# Altium PCB PCB1.PcbDoc (part 1 of 2)
Units mm, origin at the board's own origin, x right, y up, seen from the top; angles counter-clockwise.
Board outline 60 x 47.5 mm, 2 copper layers (Top Layer, Bottom Layer), stack 1.591 mm thick; 64 components, 51 nets, 234 pads, 103 vias.
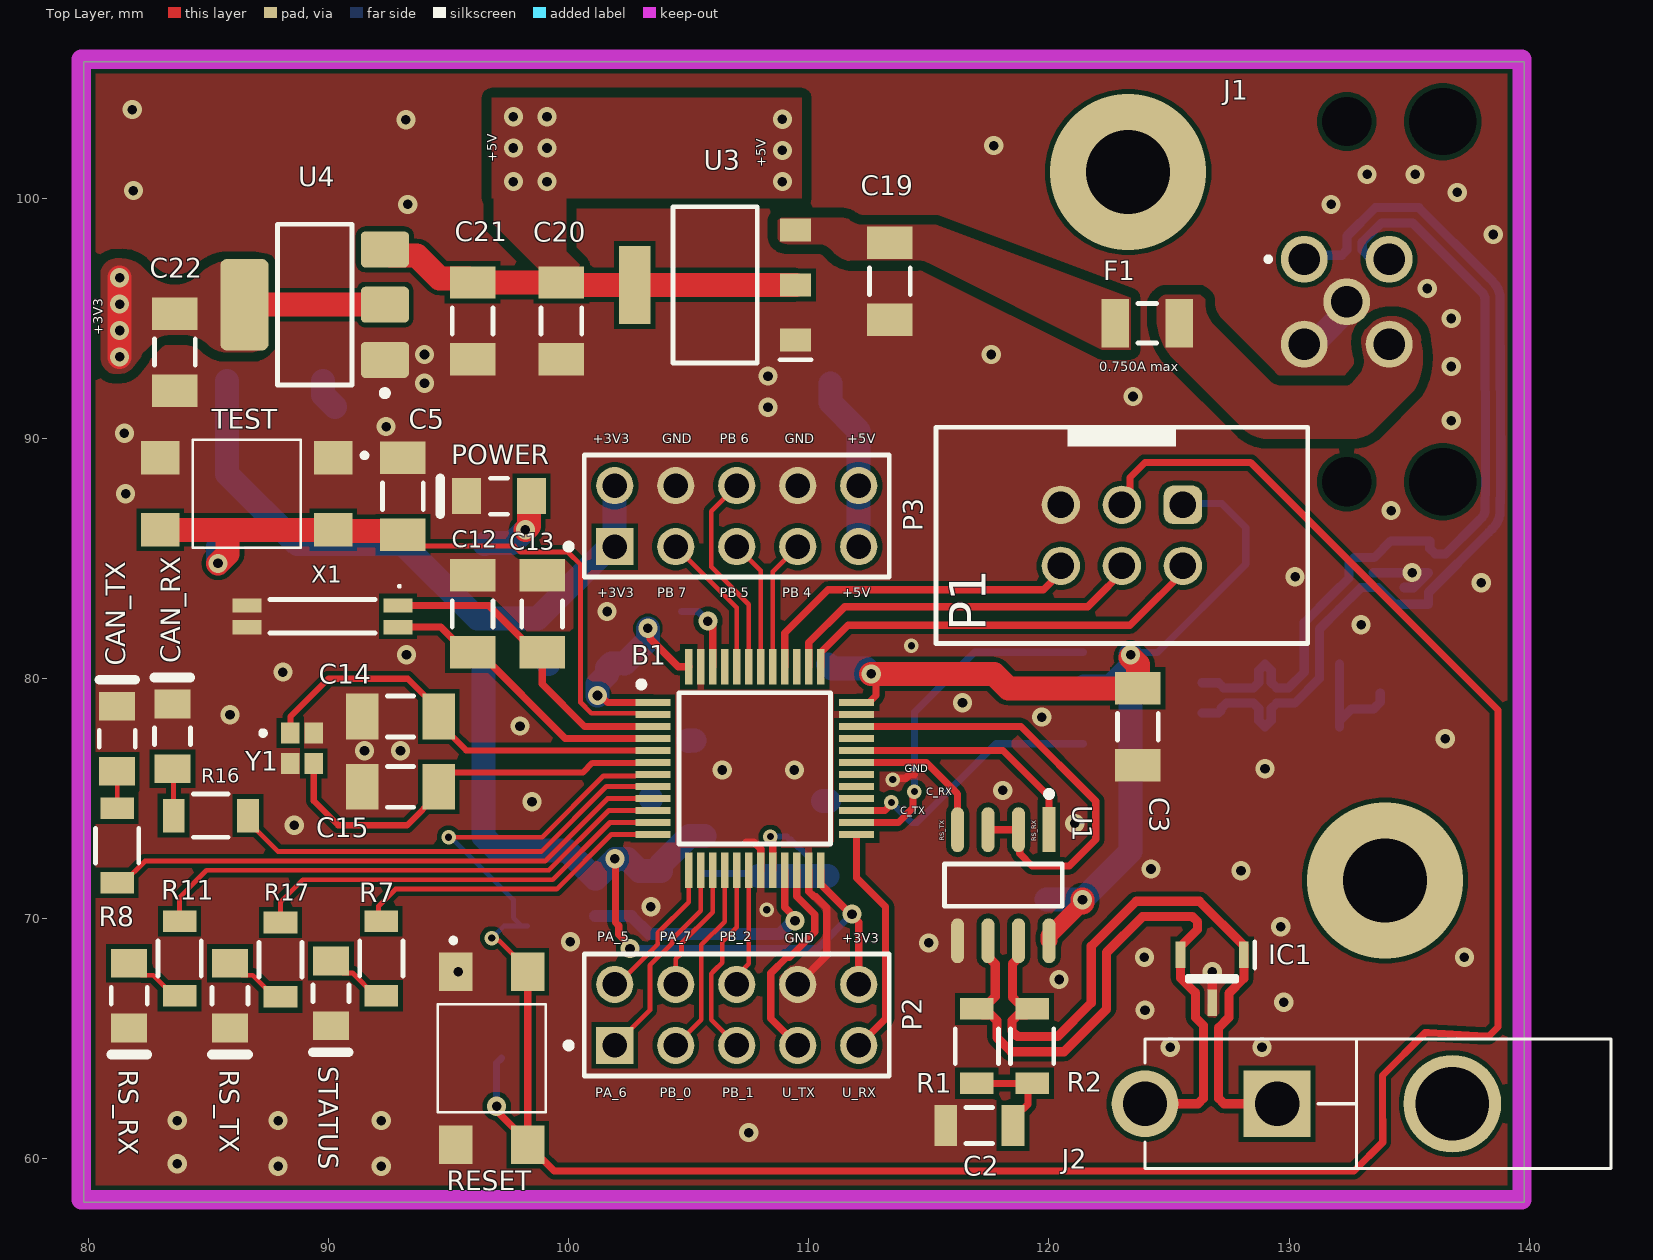
[diagram p0: Top Layer view]
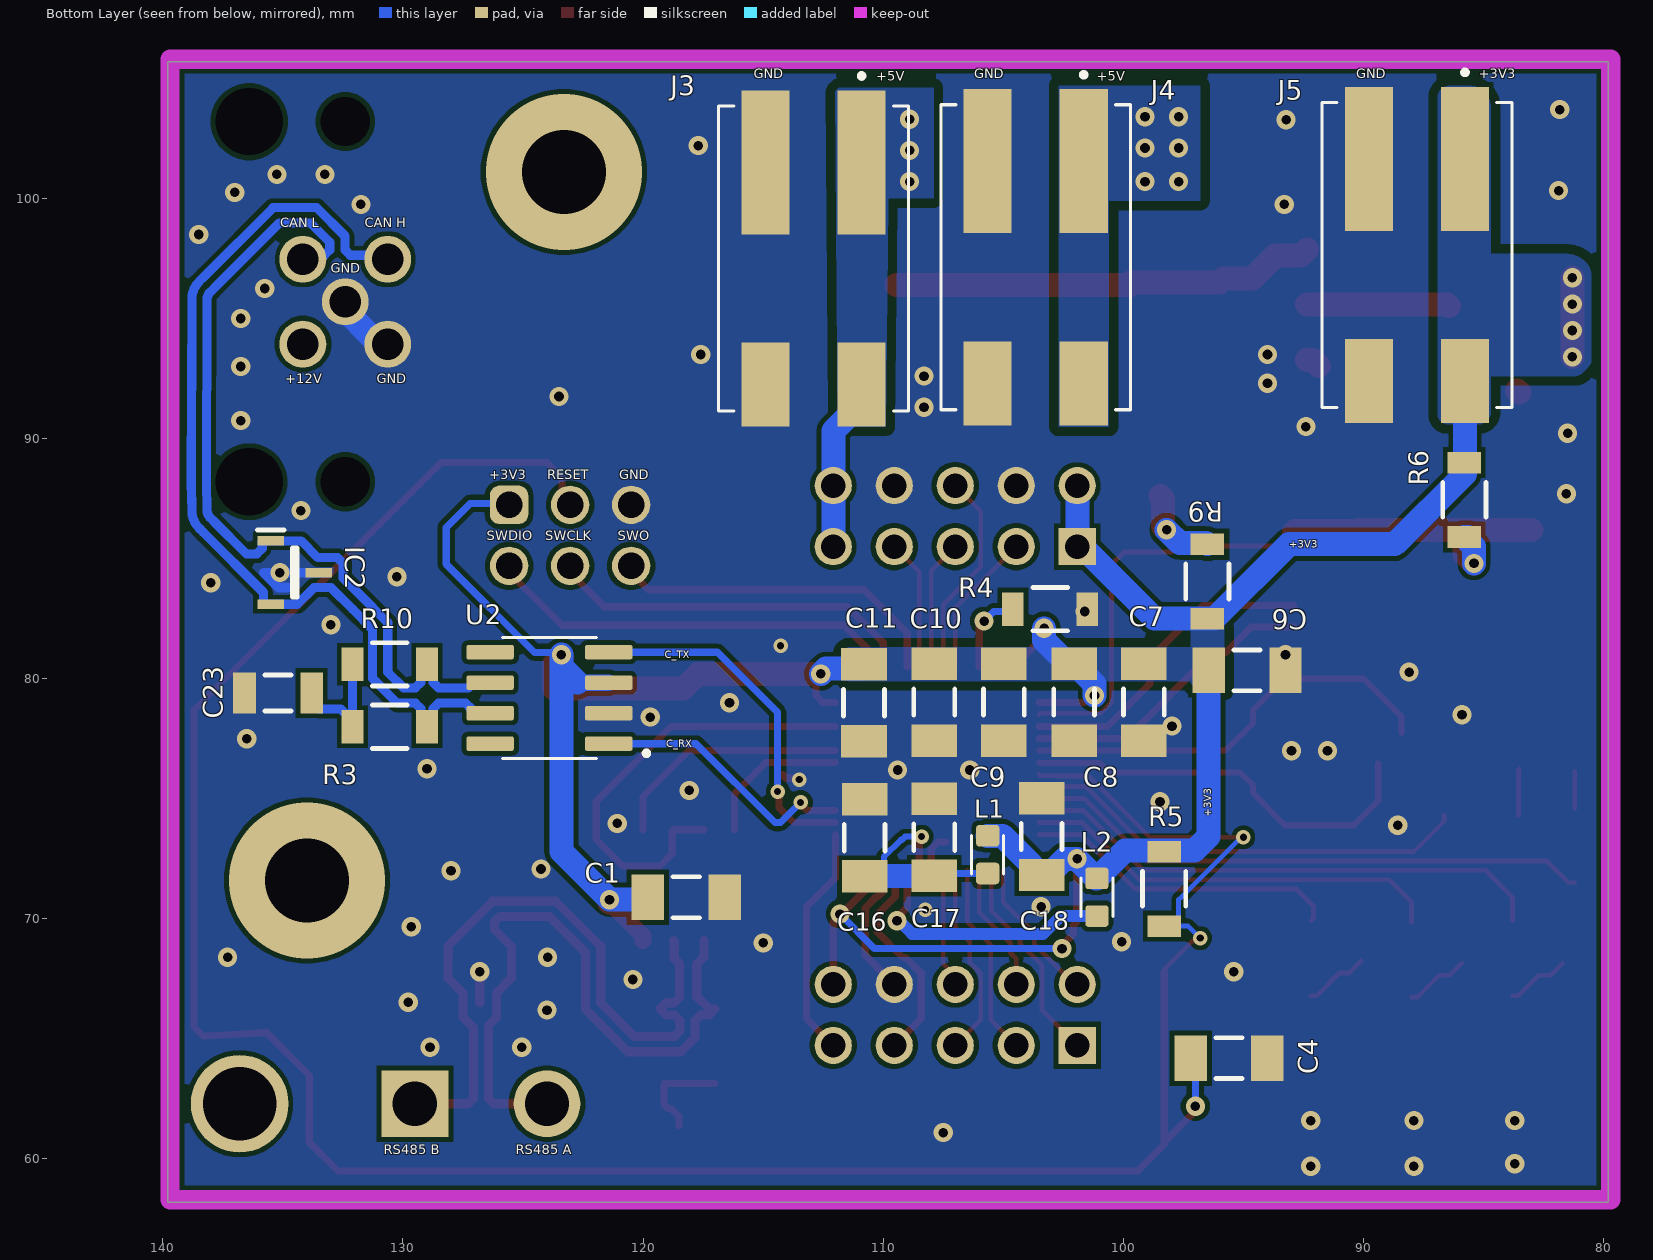
[diagram p1: Bottom Layer view, seen from below]
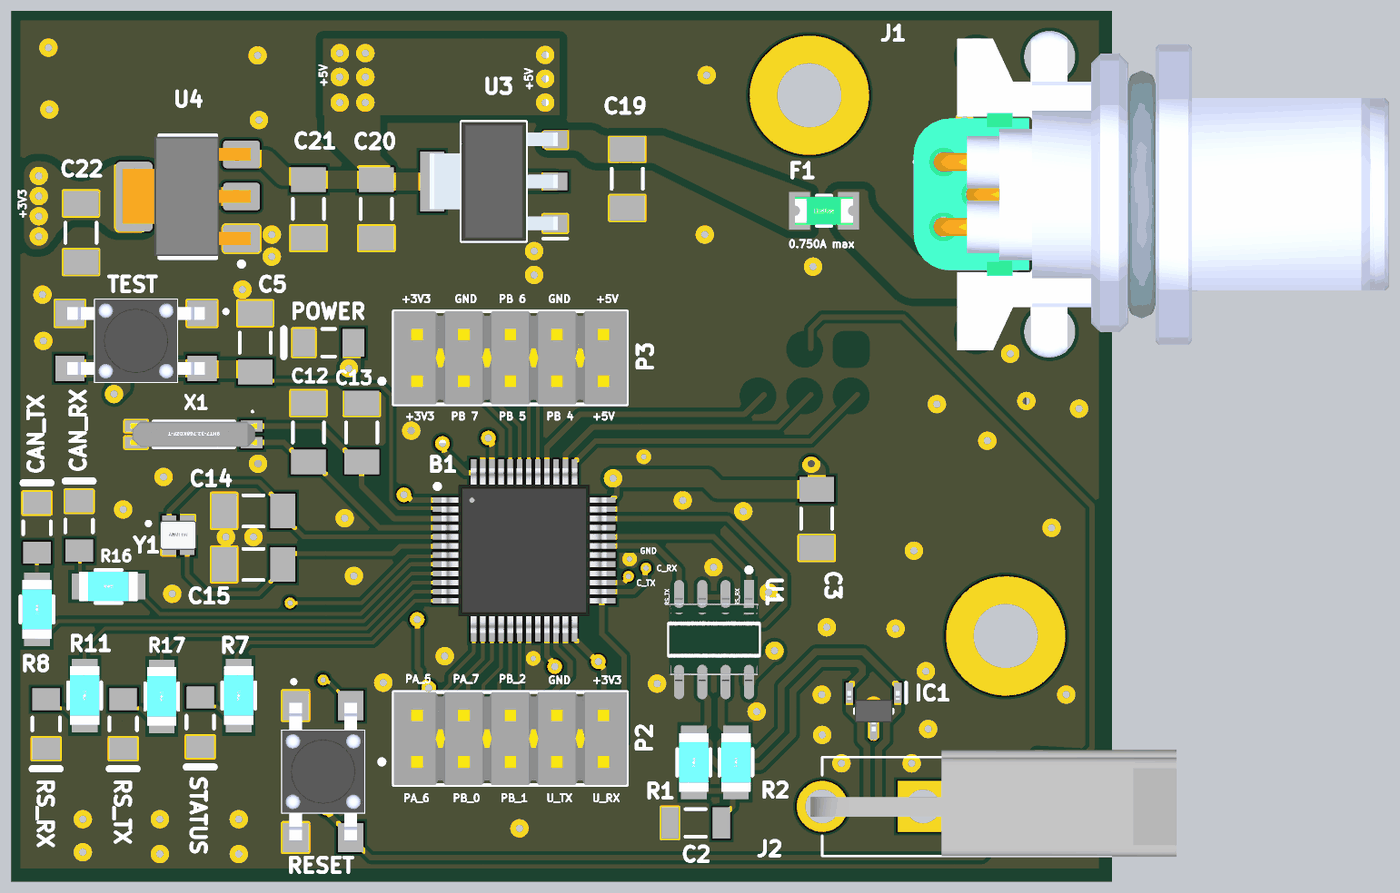
[diagram p2: 3D render of the assembled board from above, using the file's embedded part models]
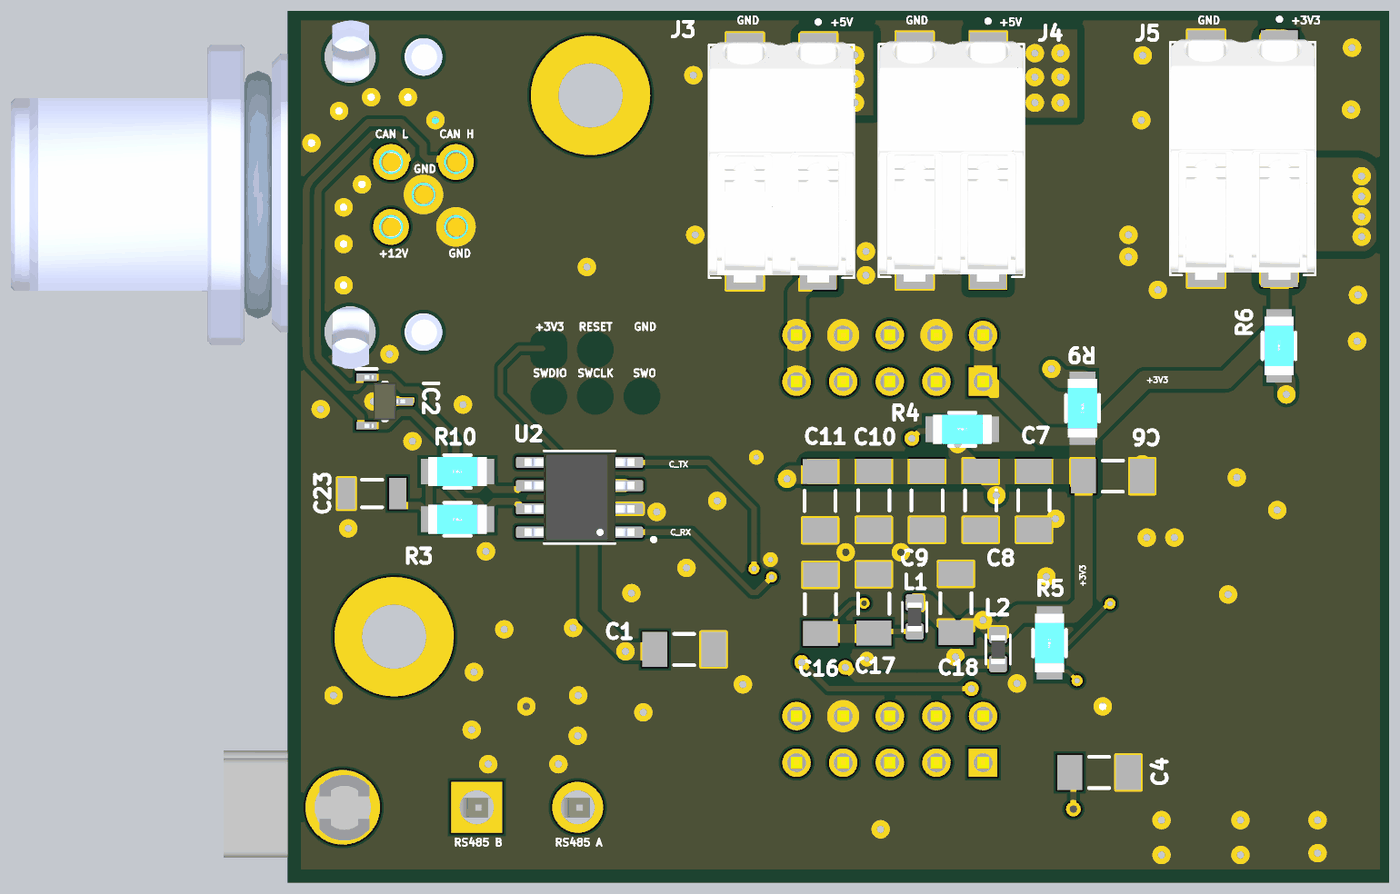
[diagram p3: 3D render of the assembled board from below, using the file's embedded part models]

## Layer stack, top to bottom
Top Solder: solder mask 0.0102, Solder Resist, Dk 3.5
Top Layer: signal copper 0.0356
Dielectric 1: dielectric 1.52, FR-4, Dk 4.8
Bottom Layer: signal copper 0.0356
Bottom Solder: solder mask 0.0102, Solder Resist, Dk 3.5

## Board outline
79.8,58.2 79.8,105.7 139.8,105.7 139.8,58.2

## Design rules (kind name [scope] priority, off if disabled: settings)
AssemblyTestPointUsage [All] p1: isadvanced=TRUE
AssemblyTestpoint [All] p1: isadvanced=TRUE testpointundercomponent=TRUE minsize=1.016 maxsize=2.54 preferedsize=1.524 minholesize=0 maxholesize=1.016 preferedholesize=0.813 testpointgrid=0.025 usegrid=TRUE gridtolerance=0 allowsidetop=TRUE allowsidebottom=TRUE
BoardOutlineClearance BoardOutlineClearance_1 [All] p1: isadvanced=TRUE gap=0.2 ignorepadtopadclearanceinfootprint=FALSE
Clearance "Clearance Power-GND" [InPolygon AND InNet('GND') vs InPolygon AND (InNet('+12V_EXT') OR InNet('+12V') OR InNet('+5V_OUT') OR InNet('+3V3'))] p1: isadvanced=TRUE gap=0.4 ignorepadtopadclearanceinfootprint=FALSE
Clearance "Clearance Power Polygons" [InPolygon AND (InNet('+12V_EXT') OR InNet('+12V') OR InNet('+5V_OUT') OR InNet('+3V3'))] p2: isadvanced=TRUE gap=0.4 ignorepadtopadclearanceinfootprint=FALSE
Clearance "Clearance GND Polygons" [InNet('GND')] p3: isadvanced=TRUE gap=0.2 ignorepadtopadclearanceinfootprint=FALSE
Clearance "Clearance Crystal" [HasFootprint('XTAL_ABM11W-24.0000MHZ-8-D1X-T3')] p4: isadvanced=TRUE gap=0.15 ignorepadtopadclearanceinfootprint=FALSE
Clearance Clearance_1 [OnMid vs OnMid] p5: gap=0.19 ignorepadtopadclearanceinfootprint=FALSE sourcerule=52 cellrowname=All cellrowtype=0 cellcolname=All cellcoltype=0 innerlayers=TRUE
Clearance Clearance_2 [(ExistsOnLayer('Top Layer') Or ExistsOnLayer('Bottom Layer')) vs (ExistsOnLayer('Top Layer') Or ExistsOnLayer('Bottom Layer'))] p6: gap=0.19 ignorepadtopadclearanceinfootprint=FALSE sourcerule=52 cellrowname=All cellrowtype=0 cellcolname=All cellcoltype=0 outerlayers=TRUE
Clearance [All] p7: gap=0.254 ignorepadtopadclearanceinfootprint=FALSE ismatrix=TRUE
ComponentClearance [All] p1: isadvanced=TRUE gap=0.254 collisioncheckmode=3 verticalgap=0.254 showdistances=FALSE
DiffPairsRouting [All] p1: maxlimit=0.254 minlimit=0.254 mostfreqgap=0.254 toplayer_minwidth=0.381 toplayer_maxwidth=0.381 toplayer_prefwidth=0.381 bottomlayer_minwidth=0.381 bottomlayer_maxwidth=0.381 bottomlayer_prefwidth=0.381 maxuncoupledlength=12.7
FabricationTestPointUsage [All] p1: isadvanced=TRUE valid=0 allowmultiple=FALSE
FabricationTestpoint [All] p1: isadvanced=TRUE side=3 testpointundercomponent=TRUE minsize=1.016 maxsize=2.54 preferedsize=1.524 minholesize=0 maxholesize=1.016 preferedholesize=0.813 testpointgrid=0.025 allowsidetop=TRUE allowsidebottom=TRUE usegrid=TRUE gridtolerance=0
FanoutControl Fanout_BGA [IsBGA] p1: isadvanced=TRUE bgadir=Out bgaviamode=Centered fanoutstyle=Auto fanoutdirection=Alternating viagrid=0.025 // Fanout_BGA (Default Rule)
FanoutControl Fanout_LCC [IsLCC] p2: isadvanced=TRUE bgadir=Out bgaviamode=Centered fanoutstyle=Auto fanoutdirection=Alternating viagrid=0.025 // Fanout_LCC (Default Rule)
FanoutControl Fanout_SOIC [IsSOIC] p3: isadvanced=TRUE bgadir=Out bgaviamode=Centered fanoutstyle=Auto fanoutdirection=Alternating viagrid=0.025 // Fanout_SOIC (Default Rule)
FanoutControl Fanout_Small [(CompPinCount < 5)] p4: isadvanced=TRUE bgadir=Out bgaviamode=Centered fanoutstyle=Auto fanoutdirection=OutThenIn viagrid=0.025 // Fanout_Small (Default Rule)
FanoutControl Fanout_Default [All] p5: isadvanced=TRUE bgadir=Out bgaviamode=Centered fanoutstyle=Auto fanoutdirection=Alternating viagrid=0.025 // Fanout_Default (Default Rule)
Height [All] p1: isadvanced=TRUE minheight=0 maxheight=25.4 prefheight=12.7
HoleSize [All] p1: isadvanced=TRUE absolutevalues=TRUE maxlimit=5 minlimit=0.025 maxpercent=80.000 minpercent=20.000
HoleToHoleClearance [All] p1: isadvanced=TRUE gap=0.254 allowstackedmicrovias=TRUE
LayerPairs [All] p1: isadvanced=TRUE enforce=TRUE
MinimumSolderMaskSliver [All] p1: isadvanced=TRUE minsoldermaskwidth=0
NetAntennae [All] p1: isadvanced=TRUE netantennaetolerance=0
PasteMaskExpansion [All] p1: isadvanced=TRUE expansion=0
PlaneClearance [All] p1: isadvanced=TRUE clearance=0.508
PlaneConnect [All] p1: isadvanced=TRUE planeconnectstyle=Direct reliefexpansion=0.508 reliefentries=4 reliefconductorwidth=0.254 reliefairgap=0.254
PolygonConnect "GND Polygon" [InNet('GND')] p1: isadvanced=TRUE connectstyle=Direct reliefconductorwidth=0.254 reliefentries=4 polygonreliefangle="45 Angle" airgapwidth=0.254
PolygonConnect "+12V Polygon" [InNet('+12V') vs InNet('+12V')] p2: isadvanced=TRUE connectstyle=Direct reliefconductorwidth=0.254 reliefentries=2 polygonreliefangle="0 Angle" airgapwidth=0.254
PolygonConnect "+5V_OUT Polygon" [InNet('+5V_OUT') vs InNet('+5V_OUT')] p3: isadvanced=TRUE connectstyle=Direct reliefconductorwidth=0.254 reliefentries=2 polygonreliefangle="0 Angle" airgapwidth=0.254
PolygonConnect "+5V_EXT Polygon" [InNet('+5V_EXT') vs InNet('+5V_EXT')] p4: isadvanced=TRUE connectstyle=Direct reliefconductorwidth=0.254 reliefentries=2 polygonreliefangle="0 Angle" airgapwidth=0.254
PolygonConnect "+3V3 Polygon" [InNet('+3V3')] p5: isadvanced=TRUE connectstyle=Direct reliefconductorwidth=0.254 reliefentries=2 polygonreliefangle="0 Angle" airgapwidth=0.254
PolygonConnect "+12V Polygon" [InNet('+12V_EXT')] p6: isadvanced=TRUE connectstyle=Direct reliefconductorwidth=0.254 reliefentries=2 polygonreliefangle="0 Angle" airgapwidth=0.254
PolygonConnect [All] p7: connectstyle=Relief reliefconductorwidth=0.254 reliefentries=4 polygonreliefangle="90 Angle" airgapwidth=0.254
RoutingCorners [All] p1: isadvanced=TRUE cornerstyle=45-Degree minsetback=2.54 maxsetback=2.54
RoutingPriority [All] p1: isadvanced=TRUE routingpriority=0
RoutingVias RoutingViaStyle_1 [All] p1: isadvanced=TRUE holewidth=0.4 width=0.8 viastyle="Through Hole" minholewidth=0.3 minwidth=0.6 maxholewidth=0.4 maxwidth=0.8
RoutingVias [All] p2: holewidth=0.711 width=1.27 viastyle="Through Hole" minholewidth=0.711 minwidth=1.27 maxholewidth=0.711 maxwidth=1.27
ShortCircuit [All] p1: isadvanced=TRUE allowed=FALSE
SilkToSilkClearance [All] p1: isadvanced=TRUE silktosilkclearance=0.254
SilkToSolderMaskClearance [IsPad] p1: isadvanced=TRUE minsilkscreentomaskgap=0.15 clearancetoexposedcopper=TRUE
SolderMaskExpansion [All] p1: isadvanced=TRUE expansion=0.102 istentingtop=FALSE
SupplyNets "Schematic Supply Nets_3" [InNet('+12V_EXT')] p1: isadvanced=TRUE voltage=0.000
SupplyNets "Schematic Supply Nets_2" [InNet('GND')] p2: isadvanced=TRUE voltage=0.000
SupplyNets "Schematic Supply Nets_1" [InNet('+5V_OUT')] p3: isadvanced=TRUE voltage=0.000
SupplyNets "Schematic Supply Nets" [InNet('+3V3')] p4: isadvanced=TRUE voltage=0.000
UnRoutedNet [All] p1: isadvanced=TRUE
UnpouredPolygon [All] p1: isadvanced=TRUE
Width [All] p1: maxlimit=1 minlimit=0.2 preferedwidth=0.3 minimp=50.000000 maximp=50.000000 favimp=50.000000
3 further rules are at their usual default settings.

## Classes and differential pairs
component class Power: C19 C20 C21 C22 F1 U3 U4
component class Microcontroller: B1 C4 C5 C6 C7 C8 C9 C10 C11 C12 C13 C14 C15 C16 C17 C18 CAN_RX CAN_TX L1 L2 POWER R4 R5 R6 R7 R8 R9 R11 R16 R17 RESET RS_RX RS_TX STATUS TEST X1 Y1
component class Main: J1 J2 J3 J4 J5 P1 P2 P3
component class Input/output: C1 C2 C3 C23 IC1 IC2 R1 R2 R3 R10 U1 U2
differential pair RS485: +RS485_P -RS485_N
differential pair CAN: +CAN_P -CAN_N

## Components (designator, comment, footprint, x,y, rotation, side; value= is the part's Value field where it differs from the comment)
B1 "STM32G491CET6" STM32G491CET6 107.75,76.262 r0 top
C1 "100n" CAPC1206(3216)170_M 118.2,70.9 r180 bottom value=47nF
C2 "4n7" CAPC1206(3216)150_L 117.1,61.4 r180 top value=1.8uF
C3 "100n" CAPC1206(3216)170_M 123.7,78 r270 top value=47nF
C4 "100n" CAPC1206(3216)170_M 95.6,64.2 r0 bottom value=47nF
C5 "100n" CAPC1206(3216)170_M 93.1,87.6 r270 top value=47nF
C6 "100n" CAPC1206(3216)170_M 94.85,80.35 r0 bottom value=47nF
C7 "100n" CAPC1206(3216)170_M 99.15,79.025 r90 bottom value=47nF
C8 "100n" CAPC1206(3216)170_M 102.05,79.025 r90 bottom value=47nF
C9 "100n" CAPC1206(3216)170_M 104.975,79.025 r90 bottom value=47nF
C10 "100n" CAPC1206(3216)170_M 107.875,79.025 r90 bottom value=47nF
C11 "4u7" CAPC1206(3216)170_M 110.8,79 r90 bottom value=47nF
C12 "12p" CAPC1206(3216)170_M 96,82.7 r270 top value=47nF
C13 "12p" CAPC1206(3216)170_M 98.9,82.7 r270 top value=47nF
C14 "12p" CAPC1206(3216)170_M 93,78.425 r0 top value=47nF
C15 "12p" CAPC1206(3216)170_M 93,75.5 r0 top value=47nF
C16 "1u" CAPC1206(3216)170_M 110.775,73.375 r270 bottom value=47nF
C17 "100n" CAPC1206(3216)170_M 107.875,73.4 r270 bottom value=47nF
C18 "100n" CAPC1206(3216)170_M 103.4,73.425 r270 bottom value=47nF
C19 "10u" CAPC1206(3216)170_M 113.375,96.55 r90 top value=47nF
C20 "22u" CAPC1206(3216)170_M 99.7,94.9 r90 top value=47nF
C21 "10u" CAPC1206(3216)170_M 96,94.9 r90 top value=47nF
C22 "22u" CAPC1206(3216)170_M 83.6,93.6 r90 top value=47nF
C23 "4n7" CAPC1206(3216)150_L 135.2,79.4 r0 bottom value=1.8uF
CAN_RX "SML-LX1206YC-TR" LUMX-SML-LX1206YC-TR_V 83.5,77.6 r90 top
CAN_TX "SML-LX1206YC-TR" LUMX-SML-LX1206YC-TR_V 81.2,77.5 r90 top
F1 "750 mA 32V" FP-0466-MFG 124.1,94.8 r180 top
IC1 "SP0502BAJTG" SOT132P220X110-3N 126.8,67.5 r270 top
IC2 "SP0502BAJTG" SOT132P220X110-3N 134.5,84.42 r180 bottom
J1 "M12A-05PMMR-SF7003" M12A05PMMRSF7003 130.632,97.468 r90 top
J2 "39-30-1020" 39-30-1020 129.5,62.3 r90 top
J3 "2060-453/998-404" WAGO-2060-452-998-404 112.9,97.5 r270 bottom
J4 "2060-453/998-404" WAGO-2060-452-998-404 103.65,97.55 r270 bottom
J5 "2060-453/998-404" WAGO-2060-452-998-404 87.775,97.65 r270 bottom
L1 "MPZ1608S601ATA00" INDC1608X95N 105.65,72.675 r90 bottom
L2 "MPZ1608S601ATA00" INDC1608X95N 101.1,70.9 r90 bottom
P1 "61200621621" 61200621621 -1146.96,-1184.03 r180 top
P2 "TSW-105-07-G-D" SMTC-TSW-105-07-G-D_V 107,66 r0 top
P3 "TSW-105-07-G-D" SMTC-TSW-105-07-G-D_V 107,86.77 r0 top
POWER "SML-LX1206YC-TR" LUMX-SML-LX1206YC-TR_V 97.1,87.6 r180 top
R1 "60" FP-RK73H2B-MFG 117,64.7 r90 top
R2 "60" FP-RK73H2B-MFG 119.3,64.7 r90 top
R3 "60" FP-RK73H2B-MFG 130.55,78 r180 bottom
R4 "10k" FP-RK73H2B-MFG 103.05,82.9 r0 bottom
R5 "10k" FP-RK73H2B-MFG 98.3,71.25 r270 bottom
R6 "10k" FP-RK73H2B-MFG 85.8,87.45 r270 bottom
R7 "1k" FP-RK73H2B-MFG 92.2,68.35 r270 top
R8 "1k" FP-RK73H2B-MFG 81.2,73.05 r90 top
R9 "1k" FP-RK73H2B-MFG 96.5,84.05 r90 bottom
R10 "60" FP-RK73H2B-MFG 130.55,80.6 r180 bottom
R11 "1k" FP-RK73H2B-MFG 83.8,68.35 r270 top
R16 "1k" FP-RK73H2B-MFG 85.1,74.3 r180 top
R17 "1k" FP-RK73H2B-MFG 88,68.3 r270 top
RESET "TL3305BF100QG" TL3305BF160QG 96.8,64.2 r270 top
RS_RX "SML-LX1206YC-TR" LUMX-SML-LX1206YC-TR_V 81.7,66.8 r270 top
RS_TX "SML-LX1206YC-TR" LUMX-SML-LX1206YC-TR_V 85.9,66.8 r270 top
STATUS "SML-LX1206YC-TR" LUMX-SML-LX1206YC-TR_V 90.1,66.9 r270 top
TEST "TL3305BF100QG" TL3305BF160QG 86.6,87.7 r180 top
U1 "SN65HVD75DR" SN65HVD75DR 118.1,71.4 r270 top
U2 "SN65HVD232D" SN65HVD232D 123.9,79.2 r0 bottom
U3 "AMS1117-5.0" AMS1117-5.0 106.1,96.4 r180 top
U4 "LDI1117-3.3H" LDI1117-3.3H 89.425,95.575 r180 top
X1 "9HT7-32.768KDZF-T" 9HT732768KDZFT 89.75,82.6 r180 top
Y1 "ABM11W-24.0000MHZ-8-D1X-T3" XTAL_ABM11W-24.0000MHZ-8-D1X-T3 88.9,77.1 r0 top

## Footprints (in the part's own frame and the unit in brackets; to place one, negate y for a bottom-side part, rotate by r counter-clockwise, add the part's x,y. Pads: shape width x height; smd on the part's side, far side on the other; paste and mask are expansions set on the pad)
9HT732768KDZFT [mm]
  rect 1.2x0.6 smd: 1(-3.15,-0.45) 2(3.15,-0.45) 3(3.15,0.45) 4(-3.15,0.45)
  silkscreen extent -3.25,-1.3 2.2,0.7, body extent -3.45,-0.71 3.45,0.69, height 1.25
39-30-1020 [mm]
  rect 2.775x2.775 / inner round 2.775 / far side rect 2.775x2.775 hole 1.85: 1(0,0)
  round 2.775 hole 1.85: 2(0,5.5)
  round 4.066 hole 3.05: P$3(0,-7.3)
  silkscreen extent -2.7,-13.9 2.7,5.5, body extent -2.72,-13.8 3.07,6.13, height 11.4
61200621621 [mm] "6 pins, straight, gold plating"
  rrect50% 1.6x1.6 hole 1.1: 1(-1272.54,-1271.27)
  round 1.6 hole 1.1: 2(-1272.54,-1268.73) 3(-1270,-1271.27) 4(-1270,-1268.73) 5(-1267.46,-1271.27) 6(-1267.46,-1268.73)
  silkscreen extent -1277.74,-1274.5 -1262.26,-1265.5, body extent -1277.64,-1274.43 -1262.36,-1265.25, height 9.13
AMS1117-5.0 [mm]
  rect 1.3x0.95 smd: 1(-3.35,2.29) 2(-3.35,0) 3(-3.35,-2.29)
  rect 1.3x3.25 smd: 4(3.35,0)
  silkscreen extent -4,-3.25 1.75,3.25, body extent -3.5,-3.25 3.5,3.25, height 1.8
CAPC1206(3216)150_L [mm] "Chip Capacitor, Body 3.2x1.6mm, Height 1.5mm, IPC High Density"
  rect 0.95x1.7 smd: 1(-1.4,0) 2(1.4,0)
  silkscreen extent -0.55,-0.75 0.55,0.75, body extent -1.7,-0.9 1.7,0.9, height 1.5
CAPC1206(3216)170_M [mm] "Chip Capacitor, Body 3.2x1.6mm, Height 1.7mm, IPC Low Density"
  rect 1.35x1.9 smd: 1(-1.6,0) 2(1.6,0)
  silkscreen extent -0.55,-0.85 0.55,0.85, body extent -1.7,-0.9 1.7,0.9, height 1.7
FP-0466-MFG [mil]
  rect 45x80 smd paste+0 mask+0: 1(-52.5,0) 2(52.5,0)
  silkscreen extent -15,-32 15,32, body extent -79,-44 79,44, height 10
FP-RK73H2B-MFG [mm]
  rect 0.9x1.4 smd paste+0 mask+0: 1(-1.55,0) 2(1.55,0)
  silkscreen extent -0.72,-0.9 0.72,0.9, body extent -1.6,-0.8 1.6,0.8, height 0.7
INDC1608X95N [mm]
  rrect30% 0.9x0.97 smd: 1(-0.785,0) 2(0.785,0)
  silkscreen extent -0.8,-0.66 0.8,0.66, body extent -0.8,-0.4 0.8,0.4, height 0.95
LDI1117-3.3H [mm] "LDI1117-3.3H, 4-Leads"
  rrect25% 2x1.5 smd: 1(-2.925,2.3) 2(-2.925,0) 3(-2.925,-2.3)
  rrect25% 2x3.8 smd: 4(2.925,0)
  silkscreen extent -3.05,-3.35 1.55,3.81, body extent -3.44,-3.26 3.56,3.24, height 1.64
LUMX-SML-LX1206YC-TR_V [mm] "SMD, 2-Leads, Body 3.2x1.5mm"
  rect 1.2x1.5 smd: 1(-1.35,0) 2(1.35,0)
  silkscreen extent -0.35,-0.75 2.45,0.75, body extent -1.6,-0.75 1.6,0.75, height 1.25
M12A05PMMRSF7003 [mm]
  round 1.95 hole 1.3: 1(0,0) 2(-3.536,0) 3(-3.536,-3.536) 4(0,-3.536) 5(-1.768,-1.768)
  round 1.025 hole 2.05 unplated: 6(5.732,-1.768) 7(-9.268,-1.768)
  round 1.4 hole 2.8 unplated: 8(-9.268,-5.768) 9(5.732,-5.768)
  silkscreen extent -0.1,1.4 0.1,1.6, body extent -11.38,-24.23 7.82,1.65, height 16.39
SMTC-TSW-105-07-G-D_V [mm] "THD, 10-Leads, Body 12.7x5.08mm, Pitch 2.54mm"
  rect 1.55x1.55 hole 1.02: 1(-5.08,-1.27)
  round 1.55 hole 1.02: 2(-5.08,1.27) 3(-2.54,-1.27) 4(-2.54,1.27) 5(0,-1.27) 6(0,1.27) 7(2.54,-1.27) 8(2.54,1.27) 9(5.08,-1.27) 10(5.08,1.27)
  silkscreen extent -7.12,-2.54 6.35,2.54, body extent -6.35,-2.54 6.35,2.54, height 8.38
SN65HVD75DR [mm]
  rect 1.869x0.542 smd paste+0 mask+0: 1(-2.314,1.905)
  rrect100% 1.869x0.542 smd paste+0 mask+0: 2(-2.314,0.635) 3(-2.314,-0.635) 4(-2.314,-1.905) 5(2.314,-1.905) 6(2.314,-0.635) 7(2.314,0.635) 8(2.314,1.905)
  silkscreen extent -3.92,-2.45 0.88,2.45, body extent -3,-2.45 3,2.45, height 1.75
SN65HVD232D [mm]
  rrect25% 1.97x0.6 smd: 1(-2.47,1.905) 2(-2.47,0.635) 3(-2.47,-0.635) 4(-2.47,-1.905) 5(2.47,-1.905) 6(2.47,-0.635) 7(2.47,0.635) 8(2.47,1.905)
  silkscreen extent -4.14,-2.52 1.95,2.52, body extent -3,-2.45 3,2.45, height 1.75
SOT132P220X110-3N [mm]
  rect 1.1x0.4 smd: 1(-1,1.32) 2(-1,-1.32) 3(1,0)
  silkscreen extent -1.55,-1.02 0.1,1.77, body extent -1.1,-1.43 1.1,1.43, height 1.1
STM32G491CET6 [mm]
  rect 1.475x0.3 smd: 1(-4.238,2.75) 2(-4.238,2.25) 3(-4.238,1.75) 4(-4.238,1.25) 5(-4.238,0.75) 6(-4.238,0.25) 7(-4.238,-0.25) 8(-4.238,-0.75) 9(-4.238,-1.25) 10(-4.238,-1.75) 11(-4.238,-2.25) 12(-4.238,-2.75) 25(4.238,-2.75) 26(4.238,-2.25) 27(4.238,-1.75) 28(4.238,-1.25) 29(4.238,-0.75) 30(4.238,-0.25) 31(4.238,0.25) 32(4.238,0.75) 33(4.238,1.25) 34(4.238,1.75) 35(4.238,2.25) 36(4.238,2.75)
  rect 0.3x1.475 smd: 13(-2.75,-4.238) 14(-2.25,-4.238) 15(-1.75,-4.238) 16(-1.25,-4.238) 17(-0.75,-4.238) 18(-0.25,-4.238) 19(0.25,-4.238) 20(0.75,-4.238) 21(1.25,-4.238) 22(1.75,-4.238) 23(2.25,-4.238) 24(2.75,-4.238) 37(2.75,4.238) 38(2.25,4.238) 39(1.75,4.238) 40(1.25,4.238) 41(0.75,4.238) 42(0.25,4.238) 43(-0.25,4.238) 44(-0.75,4.238) 45(-1.25,4.238) 46(-1.75,4.238) 47(-2.25,4.238) 48(-2.75,4.238)
  silkscreen extent -4.85,-3.15 3.15,3.62, body extent -4.5,-4.5 4.5,4.5, height 1.6
TL3305BF160QG [mm]
  rect 1.6x1.4 smd: 1(-3.6,-1.5) 2(3.6,-1.5) 3(-3.6,1.5) 4(3.6,1.5)
  silkscreen extent -5,-2.25 2.25,2.25, body extent -3.75,-2.25 3.75,2.25, height 4.9
WAGO-2060-452-998-404 [mm]
  rect 6x2 smd: 1(-4,2) 3(-4,-2)
  rect 3.5x2 smd: 2(5.25,2) 4(5.25,-2)
  silkscreen extent -7.7,-3.95 6.35,3.95, body extent -6.5,-3.95 6.6,3.95, height 4.5
XTAL_ABM11W-24.0000MHZ-8-D1X-T3 [mm]
  rect 0.775x0.875 smd: 1(-0.487,0.637) 2(-0.487,-0.637) 3(0.487,-0.637) 4(0.487,0.637)
  silkscreen extent -1.72,0.54 -1.53,0.74, body extent -1,-0.8 1,0.8, height 0.5

## Part data
B1: "ARM Microcontrollers - MCU Mainstream Arm Cortex-M4+ MCU 170MHz with 512Kbytes of Flash memory", Manufacturer_Name=STMicroelectronics, Mouser Part Number=511-STM32G491CET6, Arrow Part Number=STM32G491CET6, Arrow Price/Stock=https://www.arrow.com/en/products/stm32g491cet6/stmicroelectronics?region=nac, ComponentLink1Description=Datasheet, ComponentLink1URL=https://datasheet.octopart.com/STM32G491CET6-STMicroelectronics-datasheet-151949616.pdf?src-supplier=Future+Electronics, Datasheet Link=https://cz.mouser.com/datasheet/2/389/dm00654712-2042072.pdf, Geometry.Height=1.6mm, Manufacturer_Part_Number=STM32G491CET6, Mouser Price/Stock=https://www.mouser.co.uk/ProductDetail/STMicroelectronics/STM32G491CET6?qs=eP2BKZSCXI5LxAF%2FNuF5Tg%3D%3D, Supplier=Mouser, Supplier 1=Mouser, Supplier Part Number=511-STM32G491CET6, Supplier Part Number 1=511-STM32G491CET6
C1 C3 C4 C5 C6 C7 C8 C9 C10 C11 C12 C13 C14 C15 C16 C17 C18 C19 C20 C21 C22: library part CMP-1037-04008-1, "CAP 47nF 200V ±10% 1206 (3216 Metric) Thickness 1.7mm SMD", Case-EIA=1206, Case-Metric=3216, Rated Voltage="200 V", Tolerance=Â±10%, Max Thickness="1.7 mm", Technology=SMT
C2 C23: library part CMP-1037-04778-1, "CAP 1.8uF 10V ±5% 1206 (3216 Metric) Thickness 1.45mm SMD", Case-EIA=1206, Case-Metric=3216, Rated Voltage="10 V", Tolerance=Â±5%, Max Thickness="1.45 mm", Technology=SMT
CAN_RX CAN_TX POWER RS_RX RS_TX STATUS: library part CMP-2000-07124-1, "Yellow LED, Water Clear Len, 585 nm, 2.1 V, -40 to 85 degC, 2-Pin SMD, RoHS, Tape and Reel", Color=Yellow, Current - Test=20mA, Lens Color=Colorless, Manufacturer=Lumex, Millicandela Rating=6mcd, Package / Case=1206(3216Metric), Package Description="2-Pin Surface Mount Device, Body 3.2 x 1.5 mm", Standard Package=3,000, Supplier Device Package=1206, Voltage - Forward (Vf) (Typ)=2.1V, Catalog Drawings=SML-LX1206SeriesTopSML-LX1206SeriesSideSML-LX1206SeriesBottomSML-LX1206SeriesFootprint, Category=Optoelectronics, Datasheet URL=http://www.lumex.com/content/files/ProductAttachment/SML-LX1206YC-TR.pdf, Datasheet Version="Rev. K, 08/2012", Family=LEDIndication-Discrete, Features=-, Height (Max)=1.10mm, Lens Style/Size=RectanglewithFlatTop, Lens Transparency=Clear, Manufacturer URL=http://www.lumexinstruments.com/, Mounting Technology=SurfaceMount, Mounting Type=SurfaceMount, Online Catalog=SML-LX1206RectanglewithFlatTop1206PackageLEDs, Other Names=67-1358-2LU60357TRSMLLX1206YCTR, Package Reference=SML-LX1206YC-TR, Packaging=Tape&Reel(TR), Product Training Modules=LEDsBenefitsofCustomLEDandLCDTechnology, RoHS Information=RoHSCertofCompliance, Series=-, Size / Dimension=3.20mmLx1.60mmW, Viewing Angle=160°, Wavelength - Dominant=-, Wavelength - Peak=585nm
F1: library part CMP-08605-000088-1, "FUSE BOARD MOUNT 750MA 63VAC/VDC", Case Code (Imperial)=1206, Case Code (Metric)=3216, Current Rating=750mA, DC Cold Resistance=111mR, Max Operating Temperature=90°C, Min Operating Temperature=-50°C, Package Quantity=5000, Power Dissipation=74mW, Voltage Rating (AC)=63V, Approvals=UL, Case/Package=1206, Depth=1.52mm, Fuse Type="Board Mount (Cartridge Style Excluded)", Height=0.023inch, Housing Material=Ceramic, Lead Free="Lead Free", Length=3.18mm, Mount="Surface Mount", Packaging="Tape and Reel", RoHS Compliant=Yes, Series="SlimLine™ 466", Voltage Rating (DC)=63V, Width=0.06inch
IC1 IC2: "Integrated Circuit", Manufacturer_Name=LITTELFUSE, Mouser Part Number=576-SP0502BAJTG, Arrow Part Number=SP0502BAJTG, Arrow Price/Stock=https://www.arrow.com/en/products/sp0502bajtg/littelfuse?region=nac, Datasheet Link=https://www.littelfuse.com/~/media/electronics/datasheets/tvs_diode_arrays/littelfuse_tvs_diode_array_sp05_datasheet.pdf.pdf, Height=1.1mm, Manufacturer_Part_Number=SP0502BAJTG, Mouser Price/Stock=https://www.mouser.co.uk/ProductDetail/Littelfuse/SP0502BAJTG?qs=RnOBYWd%2Fz7cttN1Mwg4HWA%3D%3D
J1: "M12, A Code, 4A, 05 pins, Male Contact, Hexagonal, M12*1.0, PCB 90ø, Front Fastened, IP67", Current Rating=4A, Manufacturer="Amphenol LTW", Manufacturer_Name=Amphenol, Mouser Part Number=523-M12A05PMMRSF7003, Supplier Part Number=50AC2957, Voltage Rating=60V, Arrow Part Number=M12A-05PMMR-SF7003, Arrow Price/Stock=https://www.arrow.com/en/products/m12a-05pmmr-sf7003/amphenol?utm_currency=USD&region=nac, Category="Circular Connectors", ComponentLink1Description=https://datasheet.octopart.com:443/M12A-05PMMR-SF7003-Amphenol-datasheet-182346588.pdf?src-supplier=IHS, ComponentLink1URL=https://datasheet.octopart.com:443/M12A-05PMMR-SF7003-Amphenol-datasheet-182346588.pdf?src-supplier=IHS, ComponentLink2Description=https://datasheet.octopart.com:443/M12A-05PMMR-SF7003-Amphenol-LTW-datasheet-184719079.pdf?src-supplier=TME, ComponentLink2URL=https://datasheet.octopart.com:443/M12A-05PMMR-SF7003-Amphenol-LTW-datasheet-184719079.pdf?src-supplier=TME, ComponentLink3Description=https://datasheet.octopart.com:443/M12A-05PMMR-SF7003-Amphenol-LTW-datasheet-180194516.pdf?src-supplier=JRH+Electronics, ComponentLink3URL=https://datasheet.octopart.com:443/M12A-05PMMR-SF7003-Amphenol-LTW-datasheet-180194516.pdf?src-supplier=JRH+Electronics, Connector Type=Signal, Datasheet Link=https://amphenolltw.com/down.php?prod_files=605433, Gender=Male, Geometry.Height=15mm, Lifecycle Status=Production, Manufacturer Part Number=M12A-05PMMR-SF7003, Manufacturer_Part_Number=M12A-05PMMR-SF7003, Mouser Price/Stock=https://www.mouser.co.uk/ProductDetail/Amphenol-LTW/M12A-05PMMR-SF7003?qs=f9yNj16SXrIdWSE1H9dLLQ%3D%3D, Number of Positions=5, Pins=5, RoHS=Compliant, Stock=32, Supplier=Avnet
J2: "Pin Header, Power, 2 Rows, 2 Contacts, Through Hole Right Angle, Mini-Fit Jr. 5569", Color=Natural, Contact Resistance=10mΩ, Current Rating=9A, Dielectric Material=Polyamide, Flammability Rating="UL94 V-2", Insulation Resistance=1GΩ, Manufacturer=Molex, Manufacturer Lifecycle Status=ACTIVE, Max Operating Temperature=105°C, Min Operating Temperature=-40°C, Supplier Part Number=5109837P, Voltage Rating=600V, Approvals="CSA, TUV, UL", Category="Headers and Wire Housings", China RoHS=Compliant, ComponentLink1Description=https://datasheet.octopart.com:443/39-30-1020-Molex-datasheet-120074128.pdf?src-supplier=IHS, ComponentLink1URL=https://datasheet.octopart.com:443/39-30-1020-Molex-datasheet-120074128.pdf?src-supplier=IHS, ComponentLink2Description=https://datasheet.octopart.com:443/039301020-Molex-datasheet-8338717.pdf?src-supplier=Upverter, ComponentLink2URL=https://datasheet.octopart.com:443/039301020-Molex-datasheet-8338717.pdf?src-supplier=Upverter, ComponentLink3Description=https://datasheet.octopart.com:443/39-30-1020-Molex-datasheet-13785309.pdf?src-supplier=Molex, ComponentLink3URL=https://datasheet.octopart.com:443/39-30-1020-Molex-datasheet-13785309.pdf?src-supplier=Molex, ComponentLink4Description=https://sigma.octopart.com:443/15644801/technical_drawing/Molex-39-30-1020.pdf?src-supplier=Molex, ComponentLink4URL=https://sigma.octopart.com:443/15644801/technical_drawing/Molex-39-30-1020.pdf?src-supplier=Molex, ComponentLink5Description=https://datasheet.octopart.com:443/39-30-1020-Molex-datasheet-36854730.pdf?src-supplier=Farnell, ComponentLink5URL=https://datasheet.octopart.com:443/39-30-1020-Molex-datasheet-36854730.pdf?src-supplier=Farnell, ComponentLink6Description=https://datasheet.octopart.com:443/39-30-1020-Molex-datasheet-101582405.pdf?src-supplier=Farnell, ComponentLink6URL=https://datasheet.octopart.com:443/39-30-1020-Molex-datasheet-101582405.pdf?src-supplier=Farnell, ComponentLink7Description=https://datasheet.octopart.com:443/39-30-1020-..-Molex-datasheet-81470918.pdf?src-supplier=Farnell, ComponentLink7URL=https://datasheet.octopart.com:443/39-30-1020-..-Molex-datasheet-81470918.pdf?src-supplier=Farnell, ComponentLink8Description=https://datasheet.octopart.com:443/39-30-1020-Molex-datasheet-14711183.pdf?src-supplier=Farnell, ComponentLink8URL=https://datasheet.octopart.com:443/39-30-1020-Molex-datasheet-14711183.pdf?src-supplier=Farnell, ComponentLink9Description=https://datasheet.octopart.com:443/39-30-1020-Molex-datasheet-10541087.pdf?src-supplier=Farnell, ComponentLink9URL=https://datasheet.octopart.com:443/39-30-1020-Molex-datasheet-10541087.pdf?src-supplier=Farnell, ComponentLink10Description=https://datasheet.octopart.com:443/39301020-Molex-datasheet-514359.pdf?src-supplier=Farnell, ComponentLink10URL=https://datasheet.octopart.com:443/39301020-Molex-datasheet-514359.pdf?src-supplier=Farnell, ComponentLink11Description=https://datasheet.octopart.com:443/39-30-1020-Molex-datasheet-154749331.pdf?src-supplier=Master+Electronics, ComponentLink11URL=https://datasheet.octopart.com:443/39-30-1020-Molex-datasheet-154749331.pdf?src-supplier=Master+Electronics, ComponentLink12Description=https://datasheet.octopart.com:443/39-30-1020-Molex-datasheet-21827347.pdf?src-supplier=Electro+Sonic, ComponentLink12URL=https://datasheet.octopart.com:443/39-30-1020-Molex-datasheet-21827347.pdf?src-supplier=Electro+Sonic, ComponentLink13Description=https://datasheet.octopart.com:443/39-30-1020-Molex-datasheet-62104194.pdf?src-supplier=Electro+Sonic, ComponentLink13URL=https://datasheet.octopart.com:443/39-30-1020-Molex-datasheet-62104194.pdf?src-supplier=Electro+Sonic, ComponentLink14Description=https://datasheet.octopart.com:443/39-30-1020-Molex-datasheet-140183168.pdf?src-supplier=RS+(Formerly+Allied+Electronics), ComponentLink14URL=https://datasheet.octopart.com:443/39-30-1020-Molex-datasheet-140183168.pdf?src-supplier=RS+(Formerly+Allied+Electronics), ComponentLink15Description=https://datasheet.octopart.com:443/39-30-1020-Molex-datasheet-120148721.pdf?src-supplier=RS+(Formerly+Allied+Electronics), ComponentLink15URL=https://datasheet.octopart.com:443/39-30-1020-Molex-datasheet-120148721.pdf?src-supplier=RS+(Formerly+Allied+Electronics), ComponentLink16Description=https://datasheet.octopart.com:443/39-30-1020-Molex-datasheet-34442213.pdf?src-supplier=RS+(Formerly+Allied+Electronics), ComponentLink16URL=https://datasheet.octopart.com:443/39-30-1020-Molex-datasheet-34442213.pdf?src-supplier=RS+(Formerly+Allied+Electronics), ComponentLink17Description=https://datasheet.octopart.com:443/39-30-1020-Molex-datasheet-9997016.pdf?src-supplier=RS+(Formerly+Allied+Electronics), ComponentLink17URL=https://datasheet.octopart.com:443/39-30-1020-Molex-datasheet-9997016.pdf?src-supplier=RS+(Formerly+Allied+Electronics), ComponentLink18Description=https://datasheet.octopart.com:443/39-30-1020-Molex-datasheet-46140.pdf?src-supplier=RS+(Formerly+Allied+Electronics), ComponentLink18URL=https://datasheet.octopart.com:443/39-30-1020-Molex-datasheet-46140.pdf?src-supplier=RS+(Formerly+Allied+Electronics), ComponentLink19Description=https://datasheet.octopart.com:443/39301020-Molex-datasheet-82994803.pdf?src-supplier=Newark, ComponentLink19URL=https://datasheet.octopart.com:443/39301020-Molex-datasheet-82994803.pdf?src-supplier=Newark, ComponentLink20Description=https://datasheet.octopart.com:443/39-30-1020-Molex-datasheet-33002868.pdf?src-supplier=Newark, ComponentLink20URL=https://datasheet.octopart.com:443/39-30-1020-Molex-datasheet-33002868.pdf?src-supplier=Newark, ComponentLink21Description=https://datasheet.octopart.com:443/39-30-1020-Molex-datasheet-21207481.pdf?src-supplier=Newark, ComponentLink21URL=https://datasheet.octopart.com:443/39-30-1020-Molex-datasheet-21207481.pdf?src-supplier=Newark, ComponentLink22Description=https://datasheet.octopart.com:443/39-30-1020-Molex-datasheet-2405.pdf?src-supplier=Newark, ComponentLink22URL=https://datasheet.octopart.com:443/39-30-1020-Molex-datasheet-2405.pdf?src-supplier=Newark, ComponentLink23Description=https://datasheet.octopart.com:443/39301020-Molex-datasheet-137316104.pdf?src-supplier=Future+Electronics, ComponentLink23URL=https://datasheet.octopart.com:443/39301020-Molex-datasheet-137316104.pdf?src-supplier=Future+Electronics, ComponentLink24Description=https://datasheet.octopart.com:443/39-30-1020-Molex-datasheet-21395541.pdf?src-supplier=TME, ComponentLink24URL=https://datasheet.octopart.com:443/39-30-1020-Molex-datasheet-21395541.pdf?src-supplier=TME, ComponentLink25Description=https://datasheet.octopart.com:443/39301020-Molex-datasheet-7600579.pdf?src-supplier=Jameco, ComponentLink25URL=https://datasheet.octopart.com:443/39301020-Molex-datasheet-7600579.pdf?src-supplier=Jameco, ComponentLink26Description=https://datasheet.octopart.com:443/39-30-1020-Molex-datasheet-46912895.pdf?src-supplier=Jameco, ComponentLink26URL=https://datasheet.octopart.com:443/39-30-1020-Molex-datasheet-46912895.pdf?src-supplier=Jameco, ComponentLink27Description=https://datasheet.octopart.com:443/39-30-1020-Molex-datasheet-131607.pdf?src-supplier=DigiKey, ComponentLink27URL=https://datasheet.octopart.com:443/39-30-1020-Molex-datasheet-131607.pdf?src-supplier=DigiKey, ComponentLink28Description=http://sigma.octopart.com:80/15645372/rohs_certificate/Molex-39-30-1020.pdf?src-supplier=Compliance+Statements, ComponentLink28URL=http://sigma.octopart.com:80/15645372/rohs_certificate/Molex-39-30-1020.pdf?src-supplier=Compliance+Statements, ComponentLink29Description=http://sigma.octopart.com:80/conflict_mineral_statement/Molex-company-72.pdf?src-supplier=Compliance+Statements, ComponentLink29URL=http://sigma.octopart.com:80/conflict_mineral_statement/Molex-company-72.pdf?src-supplier=Compliance+Statements, ComponentLink30Description=http://sigma.octopart.com:80/rohs_statement/Molex-company-73.pdf?src-supplier=Compliance+Statements, ComponentLink30URL=http://sigma.octopart.com:80/rohs_statement/Molex-company-73.pdf?src-supplier=Compliance+Statements, ComponentLink31Description=http://sigma.octopart.com:80/reach_statement/Molex-company-74.pdf?src-supplier=Compliance+Statements, ComponentLink31URL=http://sigma.octopart.com:80/reach_statement/Molex-company-74.pdf?src-supplier=Compliance+Statements, Connector Type="Power, Rectangular", Contact Gender=Male, Contact Material=Brass, Contact Plating=Tin, Country of Origin=US, Depth=13.38mm, ELV=Compliant, Gender=Male, Glow Wire Compliant=Non-compliant, Halogen Free="Low Halogen", Height=14.76mm, Housing Material=Nylon, Lead Free="Lead Free", Lead Pitch=4.2mm, Length=36.07mm, Lifecycle Status=Production, Manufacturer Part Number=39-30-1020, Material=Nylon, Mounting Technology="PCB, Through Hole", Number of Circuits=2, Number of Contacts=2, Number of Poles=2, Number of Positions=2, Number of Rows=2, Orientation="Right Angle", Pins=2, Pitch=4.2mm, Plating Thickness=2.54µm, Radiation Hardening=No, REACH SVHC=Yes, RoHS=Compliant, Row Spacing=4.2mm, Schedule B="8536694040, 8536694040|8536694040, 8536694040|8536694040|8536694040, 8536694040|8536694040|8536694040|8536694040", Stock=13118, Supplier=RS, Termination=Solder, Voltage Rating (AC)=600V, Voltage Rating (DC)=600V, Working Voltage=600V
J3 J4 J5: library part WAGO-2060-452-998-404, "SMD Pcb Terminal Block, Push-button 0.75 MM² Pin Spacing 4 Mm 3-POLE White", Color=White, Current Rating=9A, Flammability Rating="UL94 V-0", Manufacturer=WAGO, Voltage Rating=320V, Approvals="CSA, EN, IEC, KEMA, cUL", Category="Terminal Blocks", China RoHS=Compliant, ComponentLink1Description=https://datasheet.octopart.com:443/2060-453-998-404-WAGO-datasheet-38222450.pdf?src-supplier=SOS+electronic, ComponentLink1URL=https://datasheet.octopart.com:443/2060-453-998-404-WAGO-datasheet-38222450.pdf?src-supplier=SOS+electronic, ComponentLink2Description=https://datasheet.octopart.com:443/2060-453-998-404-WAGO-datasheet-49279272.pdf?src-supplier=Newark, ComponentLink2URL=https://datasheet.octopart.com:443/2060-453-998-404-WAGO-datasheet-49279272.pdf?src-supplier=Newark, ComponentLink3Description=https://datasheet.octopart.com:443/2060-453-998-404-WAGO-datasheet-182466479.pdf?src-supplier=Future+Electronics, ComponentLink3URL=https://datasheet.octopart.com:443/2060-453-998-404-WAGO-datasheet-182466479.pdf?src-supplier=Future+Electronics, ComponentLink4Description=https://datasheet.octopart.com:443/2060-453-998-404-WAGO-datasheet-26529559.pdf?src-supplier=Future+Electronics, ComponentLink4URL=https://datasheet.octopart.com:443/2060-453-998-404-WAGO-datasheet-26529559.pdf?src-supplier=Future+Electronics, ComponentLink5Description=https://datasheet.octopart.com:443/2060-453-998-404-WAGO-datasheet-140898747.pdf?src-supplier=Future+Electronics, ComponentLink5URL=https://datasheet.octopart.com:443/2060-453-998-404-WAGO-datasheet-140898747.pdf?src-supplier=Future+Electronics, ComponentLink6Description=https://datasheet.octopart.com:443/2060-453-998-404-WAGO-datasheet-164886439.pdf?src-supplier=Burklin+Elektronik, ComponentLink6URL=https://datasheet.octopart.com:443/2060-453-998-404-WAGO-datasheet-164886439.pdf?src-supplier=Burklin+Elektronik, Contact Material=Tin, Contact Plating=Tin, Height=4.5mm, Lead Free="Lead Free", Length=11.9mm, Lifecycle Status=Production, Manufacturer Part Number=2060-453/998-404, Material="Copper, Tin", Number of Contacts=3, Number of Levels=1, Number of Rows=1, Orientation=Horizontal, Pitch=4mm, Pricing="1=0,602, 10=0,569, 25=0,552, 100=0,533, 500=0,528, 1000=0,523 (USD)", REACH SVHC=Yes, RoHS=Compliant, Schedule B=8536695050, Stock=3276, Stripping Length=-7mm, Supplier="Arrow Electronics", Supplier Part Number=2060-453/998-404, Width=10.1mm, Wire/Cable Gauge=18AWG
L1 L2: "Ferrite Beads Multi-Layer 600Ohm 25% 100MHz 1A 0.15Ohm DCR 0603 T/R", Case Code (Imperial)=0603, Case Code (Metric)=1608, Clock Frequency=100MHz, Current Rating=1A, DC Resistance (DCR)=150mΩ, Manufacturer=TDK, Manufacturer Lifecycle Status=PRODUCTION, Max Operating Temperature=125°C, Min Operating Temperature=-55°C, Package="0603 TDK", Supplier Part Number=2800777, Tolerance=25%, Case/Package=0603, Category="Ferrite Beads and Chips", Check_prices=https://www.snapeda.com/parts/MPZ1608S601ATA00/TDK/view-part/?ref=eda, China RoHS=Compliant, ComponentLink1Description=https://datasheet.octopart.com:443/MPZ1608S601ATA00-TDK-datasheet-155380319.pdf?src-supplier=TDK, ComponentLink1URL=https://datasheet.octopart.com:443/MPZ1608S601ATA00-TDK-datasheet-155380319.pdf?src-supplier=TDK, ComponentLink2Description=https://datasheet.octopart.com:443/MPZ1608S601ATA00-TDK-datasheet-141913842.pdf?src-supplier=TME, ComponentLink2URL=https://datasheet.octopart.com:443/MPZ1608S601ATA00-TDK-datasheet-141913842.pdf?src-supplier=TME, ComponentLink3Description=https://datasheet.octopart.com:443/MPZ1608S601ATA00-TDK-datasheet-82475260.pdf?src-supplier=Newark, ComponentLink3URL=https://datasheet.octopart.com:443/MPZ1608S601ATA00-TDK-datasheet-82475260.pdf?src-supplier=Newark, ComponentLink4Description=https://datasheet.octopart.com:443/MPZ1608S601ATA00-TDK-datasheet-99917310.pdf?src-supplier=Newark, ComponentLink4URL=https://datasheet.octopart.com:443/MPZ1608S601ATA00-TDK-datasheet-99917310.pdf?src-supplier=Newark, ComponentLink5Description=https://datasheet.octopart.com:443/MPZ1608S601ATA00-TDK-datasheet-8852356.pdf?src-supplier=Newark, ComponentLink5URL=https://datasheet.octopart.com:443/MPZ1608S601ATA00-TDK-datasheet-8852356.pdf?src-supplier=Newark, ComponentLink6Description=https://datasheet.octopart.com:443/MPZ1608S601ATA00-TDK-datasheet-21631858.pdf?src-supplier=Farnell, ComponentLink6URL=https://datasheet.octopart.com:443/MPZ1608S601ATA00-TDK-datasheet-21631858.pdf?src-supplier=Farnell, ComponentLink7Description=https://datasheet.octopart.com:443/MPZ1608S601ATA00-TDK-datasheet-38423207.pdf?src-supplier=Future+Electronics, ComponentLink7URL=https://datasheet.octopart.com:443/MPZ1608S601ATA00-TDK-datasheet-38423207.pdf?src-supplier=Future+Electronics, Core Material=Ferrite, Depth=800µm, ESR=150mΩ, Height=800µm, Impedance=600Ω, Lead Free="Lead Free", Length=1.6mm, Lifecycle Status=Production, Manufacturer Part Number=MPZ1608S601ATA00, Max DC Current=1A, Max Length=1.75mm, Max Width=950µm, MF=TDK, Min Length=1.45mm, Min Width=650µm, Mounting Technology="Surface Mount", MP=MPZ1608S601ATA00, Number of Circuits=1, Number of Terminals=2, Packaging="Cut Tape", REACH SVHC=Yes, RMS Current (Irms)=1A, RoHS=Compliant, Schedule B="8504500000, 8504500000|8504500000|8504500000|8504500000|8504500000", SnapEDA_Link=https://www.snapeda.com/parts/MPZ1608S601ATA00/TDK/view-part/?ref=snap, Stock=80000, Supplier=Farnell, Termination=SMD/SMT, Test Frequency=100MHz, Weight=2.012816mg, Width=800µm
P1: library part CMP-1502-00000-2, Color=Black, Contact Resistance=20mΩ, Current Rating=3A, Insulation Resistance=1GΩ, Max Operating Temperature=105°C, Min Operating Temperature=-40°C, Operating Supply Voltage=250V, Connector Type="Male Pin", Contact Material=Copper, Contact Plating=Gold, Gender=Male, Insulation Material=PBT, Lead Pitch=2.54mm, Length=15.28mm, Mount="Through Hole", NexarPartId=32855456, Number of Contacts=6, Number of Pins=6, Number of Positions=6, Number of Rows=2, Orientation=Vertical, Pitch=2.54mm, REACH SVHC=Unknown, RoHS=Compliant, Row Spacing=2.54mm, Termination=Solder
P2 P3: library part CMP-2000-07330-1, "Post Terminal Strip Assembly, Pitch 2.54 mm, 2 x 5 Position, Height 8.58 mm, Tail Length 2.54 mm, -55 to 125 degC, RoHS, Bulk", Color=Black, Manufacturer=Samtec-Inc., Package Description="Male Header, Pitch 2.54 mm, 2 x 5 Position, Height 8.58 mm, Tail Length 2.54 mm", Category=Connectors,Interconnects, Connector Type=Header,Unshrouded, Contact Finish=Gold, Contact Finish Thickness=10µin(0.25µm), Contact Mating Length="0.230\"(5.84mm)", Contact Type=MalePin, Datasheet URL=http://suddendocs.samtec.com/prints/tsw-xxx-xx-xxx-x-xx-xxx-mkt.pdf, Datasheet Version="Rev. DO, 08/1988", Family=RectangularConnectors-Headers,MalePins, Fastening Type=-, Features=-, Manufacturer URL=http://www.samtec.com/, Mounting Technology=ThroughHole, Mounting Type=ThroughHole, Number of Positions=10, Number of Positions Loaded=All, Number of Rows=2, Package Reference=TSW-105-07-G-D, Package URL=http://suddendocs.samtec.com/prints/tsw-xxx-xx-x-x-xx-xxx-footprint.pdf, Packaging=Bulk, Pitch="0.100\"(2.54mm)", Row Spacing="0.100\"(2.54mm)", Series=TSW, Termination=Solder
R1 R2 R3 R4 R5 R6 R7 R8 R9 R10 R11 R16 R17: library part CMP-04015-098385-1, "40.2kΩ ±1% 0.25W Chip Resistor 1206 Thick Film AEC-Q200 Qualified", Case Code (Imperial)=1206, Case Code (Metric)=3216, Max Operating Temperature=155°C, Min Operating Temperature=-55°C, Package Quantity=5000, Power Rating=250mW, Resistance=40.2kR, Temperature Coefficient=100ppm/°C, Tolerance=1%, Voltage Rating=200V, Case/Package=1206, Height=0.6mm, Lead Free="Contains Lead", Length=3.2mm, Packaging="Tape and Reel", RoHS Compliant=No, Series=RK73H, Termination=SMD/SMT, Voltage Rating (DC)=200V, Width=1.6mm
RESET TEST: "TL3305 Ultra-Miniature Tact Switch 100gf 5.0mm actuator Silver Contact Gullwing", Manufacturer=E-Switch, Mouser Part Number=612-TL3305BF100QG, Supplier Part Number=4539028, Category="Tactile Switches", ComponentLink1Description=https://datasheet.octopart.com:443/TL3305BF100QG-E-Switch-datasheet-181388209.pdf?src-supplier=Future+Electronics, ComponentLink1URL=https://datasheet.octopart.com:443/TL3305BF100QG-E-Switch-datasheet-181388209.pdf?src-supplier=Future+Electronics, ComponentLink2Description=https://datasheet.octopart.com:443/TL3305BF100QG-E-Switch-datasheet-188129426.pdf?src-supplier=Future+Electronics, ComponentLink2URL=https://datasheet.octopart.com:443/TL3305BF100QG-E-Switch-datasheet-188129426.pdf?src-supplier=Future+Electronics, Datasheet Link=https://configured-product-images.s3.amazonaws.com/2D/specs/TL3305BF100QG.pdf, Manufacturer Part Number=TL3305BF100QG, Manufacturer_Name=E-Switch, Manufacturer_Part_Number=TL3305BF100QG, Mouser Price/Stock=https://www.mouser.co.uk/ProductDetail/E-Switch/TL3305BF100QG?qs=IKkN%2F947nfDIPwqPQja%252BvQ%3D%3D, RoHS=Compliant, Stock=11760, Supplier=Farnell
U1: "Single Transmitter/Receiver RS-422/RS-485 8-Pin SOIC T/R", Ambient Temperature Range High=125°C, Case/Package=SOIC, Manufacturer="Texas Instruments", Manufacturer Lifecycle Status=ACTIVE, Max Junction Temperature (Tj)=150°C, Max Supply Voltage=3.6V, Min Operating Temperature=-40°C, Min Supply Voltage=3V, Nominal Supply Current=950µA, Operating Supply Voltage=3.3V, Supplier Part Number=296-38570-1-ND, Category="RS-232 / RS-422 / RS-485 Interface ICs", ComponentLink1Description=https://datasheet.octopart.com:443/SN65HVD75DR-Texas-Instruments-datasheet-22138306.pdf?src-supplier=Texas+Instruments, ComponentLink1URL=https://datasheet.octopart.com:443/SN65HVD75DR-Texas-Instruments-datasheet-22138306.pdf?src-supplier=Texas+Instruments, ComponentLink2Description=https://octopart.com:443/opatz8j6/c1?t=n-jLi9Hpj9Y1CtPvMq2wOWlt-fEIf69pcO_lcFh_oE0lP0UEYhb18J_Iy_8ZFNUCuyymRdaX8eMNg-AWn_ExZtGn32Zq0CkiG1pBHU4b6nja_Za_5YDFtI7XDIx6JgM7tTBVSWQxX3zpR6GJKtqTpFn4N3Px7iL7giCcRUdPhbCOuuMtZjzDAulhRL4-l8kJRFa8ZYcsDjWofUjrYJp33V_cFwj6fSgilYVUsUehb6BTYstndtkD3u_E8yWStnyvQ9RuB-KDft8Cssj0uzNxAssUSPlx5j82pqaHF34l0kh9MV0qibcgTRJzKY6eoGJoP4efwPiAV05SwETRDTp4KaeNuvVDeUjJsgbn-0JDhnvl-36UpEO5PxKaD1Xwrs2QC2UoaCMc&src-supplier=Texas+Instruments, ComponentLink2URL=https://octopart.com:443/opatz8j6/c1?t=n-jLi9Hpj9Y1CtPvMq2wOWlt-fEIf69pcO_lcFh_oE0lP0UEYhb18J_Iy_8ZFNUCuyymRdaX8eMNg-AWn_ExZtGn32Zq0CkiG1pBHU4b6nja_Za_5YDFtI7XDIx6JgM7tTBVSWQxX3zpR6GJKtqTpFn4N3Px7iL7giCcRUdPhbCOuuMtZjzDAulhRL4-l8kJRFa8ZYcsDjWofUjrYJp33V_cFwj6fSgilYVUsUehb6BTYstndtkD3u_E8yWStnyvQ9RuB-KDft8Cssj0uzNxAssUSPlx5j82pqaHF34l0kh9MV0qibcgTRJzKY6eoGJoP4efwPiAV05SwETRDTp4KaeNuvVDeUjJsgbn-0JDhnvl-36UpEO5PxKaD1Xwrs2QC2UoaCMc&src-supplier=Texas+Instruments, ComponentLink3Description=https://datasheet.octopart.com:443/SN65HVD75DR-Texas-Instruments-datasheet-17762390.pdf?src-supplier=Texas+Instruments, ComponentLink3URL=https://datasheet.octopart.com:443/SN65HVD75DR-Texas-Instruments-datasheet-17762390.pdf?src-supplier=Texas+Instruments, ComponentLink4Description=https://datasheet.octopart.com:443/SN65HVD75DR-Texas-Instruments-datasheet-13302759.pdf?src-supplier=Texas+Instruments, ComponentLink4URL=https://datasheet.octopart.com:443/SN65HVD75DR-Texas-Instruments-datasheet-13302759.pdf?src-supplier=Texas+Instruments, ComponentLink5Description=https://datasheet.octopart.com:443/SN65HVD75DR-Texas-Instruments-datasheet-12493769.pdf?src-supplier=Texas+Instruments, ComponentLink5URL=https://datasheet.octopart.com:443/SN65HVD75DR-Texas-Instruments-datasheet-12493769.pdf?src-supplier=Texas+Instruments, ComponentLink6Description=https://datasheet.octopart.com:443/SN65HVD75DR-Texas-Instruments-datasheet-11514831.pdf?src-supplier=Texas+Instruments, ComponentLink6URL=https://datasheet.octopart.com:443/SN65HVD75DR-Texas-Instruments-datasheet-11514831.pdf?src-supplier=Texas+Instruments, ComponentLink7Description=https://datasheet.octopart.com:443/SN65HVD75DR-Texas-Instruments-datasheet-10945678.pdf?src-supplier=Texas+Instruments, ComponentLink7URL=https://datasheet.octopart.com:443/SN65HVD75DR-Texas-Instruments-datasheet-10945678.pdf?src-supplier=Texas+Instruments, ComponentLink8Description=https://datasheet.octopart.com:443/SN65HVD75DR-Texas-Instruments-datasheet-10899452.pdf?src-supplier=Texas+Instruments, ComponentLink8URL=https://datasheet.octopart.com:443/SN65HVD75DR-Texas-Instruments-datasheet-10899452.pdf?src-supplier=Texas+Instruments, ComponentLink9Description=https://sigma.octopart.com:443/49249642/technical_drawing/Texas-Instruments-SN65HVD75DR.pdf?src-supplier=Texas+Instruments, ComponentLink9URL=https://sigma.octopart.com:443/49249642/technical_drawing/Texas-Instruments-SN65HVD75DR.pdf?src-supplier=Texas+Instruments, ComponentLink10Description=https://datasheet.octopart.com:443/SN65HVD75DR-Texas-Instruments-datasheet-47564841.pdf?src-supplier=Newark, ComponentLink10URL=https://datasheet.octopart.com:443/SN65HVD75DR-Texas-Instruments-datasheet-47564841.pdf?src-supplier=Newark, ComponentLink11Description=https://datasheet.octopart.com:443/SN65HVD75DR-Texas-Instruments-datasheet-62292549.pdf?src-supplier=Farnell, ComponentLink11URL=https://datasheet.octopart.com:443/SN65HVD75DR-Texas-Instruments-datasheet-62292549.pdf?src-supplier=Farnell, ComponentLink12Description=https://datasheet.octopart.com:443/SN65HVD75DR-Texas-Instruments-datasheet-67294880.pdf?src-supplier=Farnell, ComponentLink12URL=https://datasheet.octopart.com:443/SN65HVD75DR-Texas-Instruments-datasheet-67294880.pdf?src-supplier=Farnell, ComponentLink13Description=https://datasheet.octopart.com:443/SN65HVD75DR-Texas-Instruments-datasheet-165804306.pdf?src-supplier=LCSC, ComponentLink13URL=https://datasheet.octopart.com:443/SN65HVD75DR-Texas-Instruments-datasheet-165804306.pdf?src-supplier=LCSC, ComponentLink14Description=https://datasheet.octopart.com:443/SN65HVD75DR-Texas-Instruments-datasheet-159115721.pdf?src-supplier=LCSC, ComponentLink14URL=https://datasheet.octopart.com:443/SN65HVD75DR-Texas-Instruments-datasheet-159115721.pdf?src-supplier=LCSC, ComponentLink15Description=https://datasheet.octopart.com:443/SN65HVD75DR-Texas-Instruments-datasheet-164416300.pdf?src-supplier=SHENGYU+ELECTRONICS, ComponentLink15URL=https://datasheet.octopart.com:443/SN65HVD75DR-Texas-Instruments-datasheet-164416300.pdf?src-supplier=SHENGYU+ELECTRONICS, ComponentLink16Description=https://datasheet.octopart.com:443/SN65HVD75DR-Texas-Instruments-datasheet-137316104.pdf?src-supplier=Future+Electronics, ComponentLink16URL=https://datasheet.octopart.com:443/SN65HVD75DR-Texas-Instruments-datasheet-137316104.pdf?src-supplier=Future+Electronics, ComponentLink17Description=https://datasheet.octopart.com:443/SN65HVD75DR-Texas-Instruments-datasheet-140571633.pdf?src-supplier=Arrow.cn, ComponentLink17URL=https://datasheet.octopart.com:443/SN65HVD75DR-Texas-Instruments-datasheet-140571633.pdf?src-supplier=Arrow.cn, ComponentLink18Description=https://datasheet.octopart.com:443/SN65HVD75DR-Texas-Instruments-datasheet-11568815.pdf?src-supplier=Arrow+Electronics, ComponentLink18URL=https://datasheet.octopart.com:443/SN65HVD75DR-Texas-Instruments-datasheet-11568815.pdf?src-supplier=Arrow+Electronics, ComponentLink19Description=http://sigma.octopart.com:80/reach_statement/Texas-Instruments-company-64.pdf?src-supplier=Compliance+Statements, ComponentLink19URL=http://sigma.octopart.com:80/reach_statement/Texas-Instruments-company-64.pdf?src-supplier=Compliance+Statements, ComponentLink20Description=http://sigma.octopart.com:80/conflict_mineral_statement/Texas-Instruments-company-63.pdf?src-supplier=Compliance+Statements, ComponentLink20URL=http://sigma.octopart.com:80/conflict_mineral_statement/Texas-Instruments-company-63.pdf?src-supplier=Compliance+Statements, Contact Plating=Gold, Data Rate=20Mbps, Height=1.75mm, Interface="RS-422, RS-485", Lead Free="Lead Free", Length=4.9mm, Lifecycle Status=Production, Logic Function=Transceiver, Manufacturer Part Number=SN65HVD75DR, Max Operating Temperature=125°C, Number of Drivers=1, Number of Receivers=1, Number of Transceivers=1, Number of Transmitters=1, Packaging="Tape and Reel", Pins=8, Pricing="1=2,18, 10=1,612, 25=1,4704, 100=1,3144, 250=1,24008, 500=1,19528, 1000=1,15839 (USD)", Radiation Hardening=No, REACH SVHC=No, Receiver Hysteresis=80mV, RoHS=Compliant, Schedule B="8542390000, 8542390000|8542390000|8542390000|8542390000|8542390000", Simplex/Duplex="Half Duplex", Stock=19374, Supplier=DigiKey, Thickness=1.58mm, Width=3.91mm